# EAGLE board 256x64 (EAGLE 7.4.0)
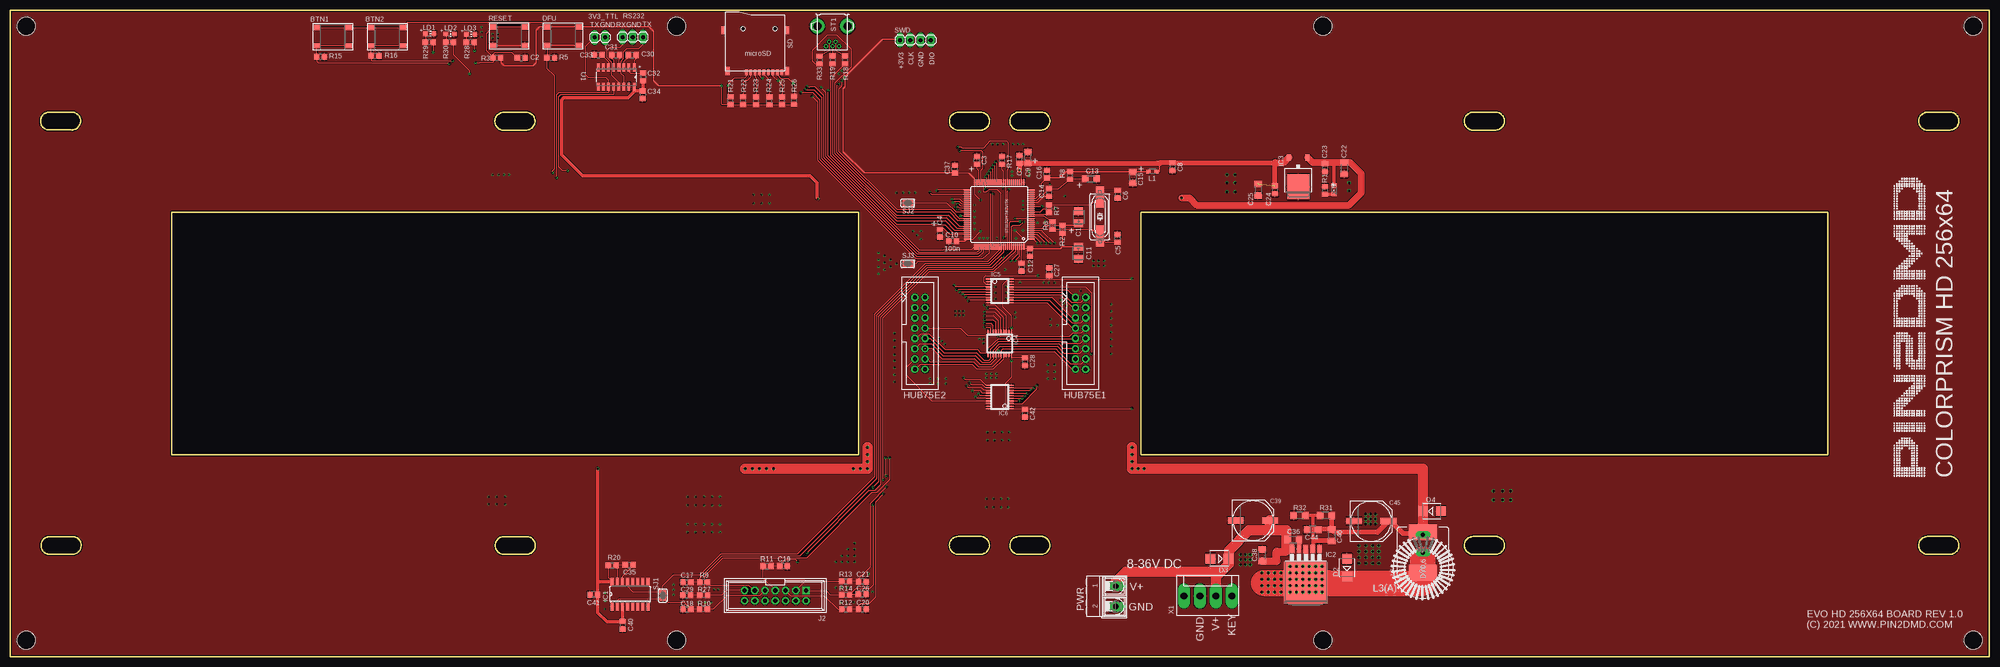
[diagram p0: board, top side]
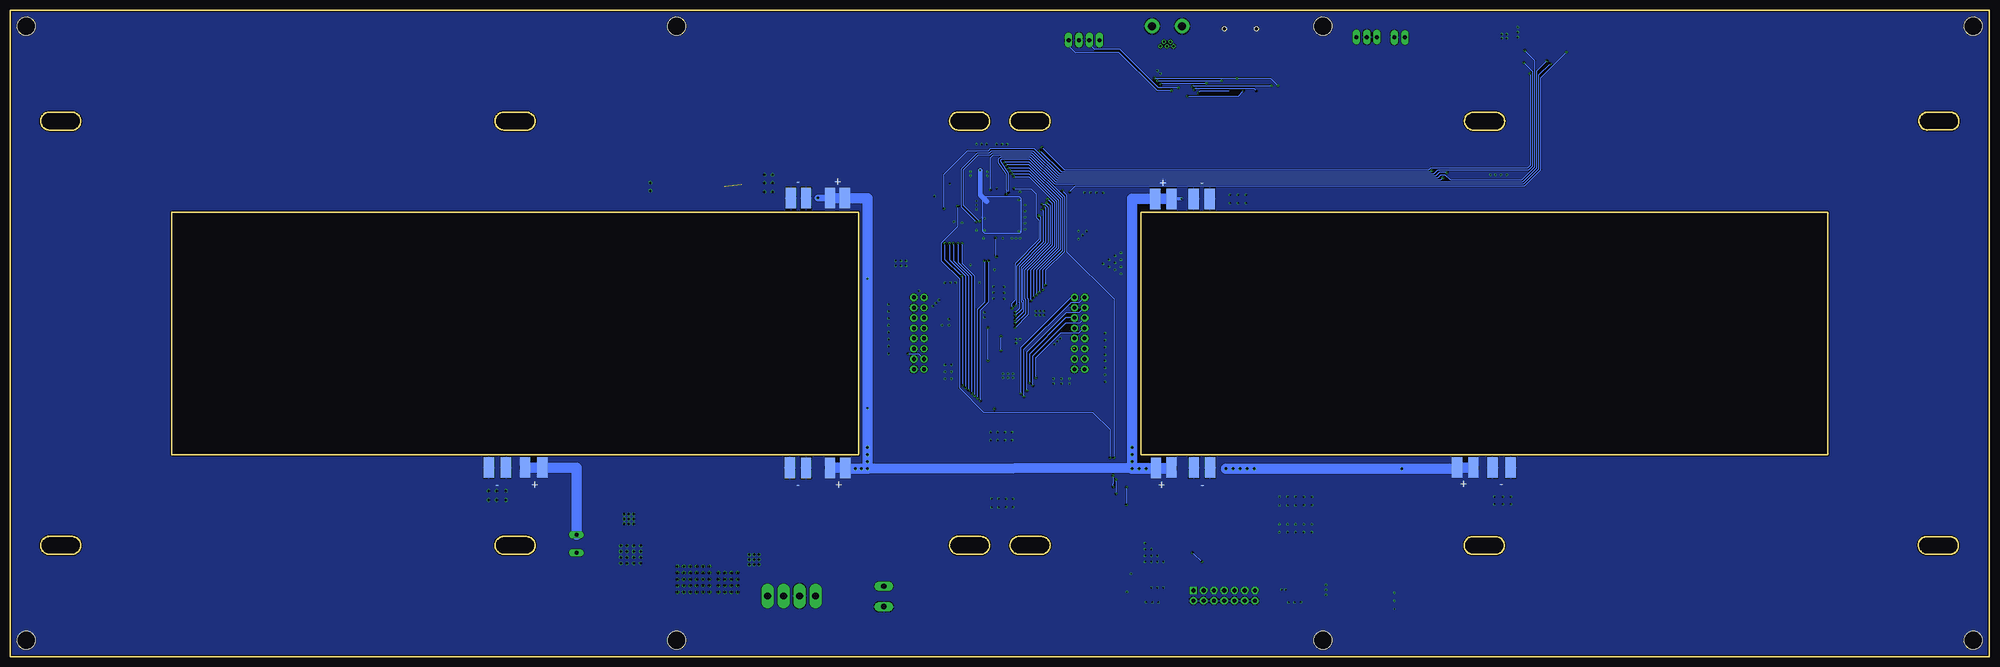
[diagram p1: board, bottom side, seen from below]

Size 490 x 160 mm. Coordinates in mm from the lower left corner, seen from the top.
Outline: 15.62,134.73 arc-174 15.11,130.32 9.44,130.32 arc-176 9.86,134.73 15.62,134.73
Outline: 15.62,134.73 15.71,134.73
Outline: 15.76,29.7 arc-174 15.25,25.3 9.57,25.3 arc-176 10,29.7 15.76,29.7
Outline: 15.76,29.7 15.84,29.7
Outline: 128.19,29.7 arc-174 127.68,25.3 122.01,25.3 arc-176 122.43,29.7 128.19,29.7
Outline: 128.19,29.7 128.37,29.7
Outline: 234.34,25.32 arc-174 234.85,29.72 240.52,29.72 arc-176 240.1,25.32 234.34,25.32
Outline: 234.34,25.32 234.26,25.32
Outline: 249.34,25.32 arc-174 249.85,29.72 255.52,29.72 arc-176 255.1,25.32 249.34,25.32
Outline: 249.34,25.32 249.26,25.32
Outline: 361.84,25.32 arc-174 362.35,29.72 368.02,29.72 arc-176 367.6,25.32 361.84,25.32
Outline: 361.84,25.32 361.76,25.32
Outline: 474.34,25.32 arc-174 474.85,29.72 480.52,29.72 arc-176 480.1,25.32 474.34,25.32
Outline: 474.34,25.32 474.26,25.32
Outline: 474.34,130.32 arc-174 474.85,134.72 480.52,134.72 arc-176 480.1,130.32 474.34,130.32
Outline: 474.34,130.32 474.26,130.32
Outline: 361.84,130.32 arc-174 362.35,134.72 368.02,134.72 arc-176 367.6,130.32 361.84,130.32
Outline: 361.84,130.32 361.76,130.32
Outline: 249.34,130.32 arc-174 249.85,134.72 255.52,134.72 arc-176 255.1,130.32 249.34,130.32
Outline: 249.34,130.32 249.26,130.32
Outline: 0,160 490,160 490,0 0,0 0,160
Outline: 40,50 210,50 210,110 40,110 40,50
Outline: 121.91,130.28 arc-176 122.33,134.69 128.09,134.69 arc-174 127.58,130.28 121.91,130.28
Outline: 234.43,130.3 arc-176 234.85,134.7 240.61,134.7 arc-174 240.1,130.3 234.43,130.3
Outline: 280,50 450,50 450,110 280,110 280,50
Copper layers (1*16): Top 0.035mm / dielectric 1.6mm / Bottom 0.035mm
Design rules "jlcpcb-2layers": minimum track width 5mil, minimum drill 0.3mm, track to track 5mil, track to pad 5mil, pad to pad 5mil, via to via 5mil, smd to smd 5mil, copper to edge 0.2mm, drill to drill 6mil, minimum pad ring 10mil, minimum via ring 3mil, stop-mask expansion 4mil, vias tented up to drill 0mil, thermal gap 10mil
Holes 4.5 mm at 4,156 165,156 486,156 486,4 165,4 4,4 325,156 325,4

## Footprints (pad centres in the part's own frame; a part is rotated, then mirrored left to right if it is on the bottom)
1X02 = drill 1.016 long: 1 -1.27,0; 2 1.27,0
430152043826 = smd 1.55 x 1.3: 1 -3.975,2.25; 2 -3.975,-2.25; 3 3.975,2.25; 4 3.975,-2.25
CT3528 = smd 2 x 2.2: + -1.5,0; - 1.5,0
C0805 = smd 1.3 x 1.5: 1 -0.95,0; 2 0.95,0
C1206 = smd 1.6 x 1.8: 1 -1.4,0; 2 1.4,0
PANASONIC_G = smd 3.9 x 1.6: + 4.25,0; - -4.25,0
SMB = smd 2.4 x 2.4: A 2.2,0; C -2.2,0
2X08-IDC = drill 1 pad 1.778: 1 -1.27,8.89; 2 1.27,8.89; 3 -1.27,6.35; 4 1.27,6.35; 5 -1.27,3.81; 6 1.27,3.81; 7 -1.27,1.27; 8 1.27,1.27; 9 -1.27,-1.27; 10 1.27,-1.27; 11 -1.27,-3.81; 12 1.27,-3.81; 13 -1.27,-6.35; 14 1.27,-6.35; 15 -1.27,-8.89; 16 1.27,-8.89
SO16 = smd 0.66 x 2.032: 1 -4.445,-3.073; 2 -3.175,-3.073; 3 -1.905,-3.073; 4 -0.635,-3.073; 5 0.635,-3.073; 6 1.905,-3.073; 7 3.175,-3.073; 8 4.445,-3.073; 9 4.445,3.073; 10 3.175,3.073; 11 1.905,3.073; 12 0.635,3.073; 13 -0.635,3.073; 14 -1.905,3.073; 15 -3.175,3.073; 16 -4.445,3.073
TO263-5 = smd 1.067 x 2.159: 1 -3.404,-5.791; 2 -1.702,-5.791; 3 0,-5.791; 4 1.702,-5.791; 5 3.404,-5.791 | smd 10.8 x 10.41: 6 0,2.54
TO252 = smd 1 x 1.6: 1 -2.28,-4.8; 2 2.28,-4.8 | smd 5.4 x 6.2: 3 0,2.5
TSSOP20 = smd 0.305 x 0.991: 1 -2.925,-2.918; 2 -2.275,-2.918; 3 -1.625,-2.918; 4 -0.975,-2.918; 5 -0.325,-2.918; 6 0.325,-2.918; 7 0.975,-2.918; 8 1.625,-2.918; 9 2.275,-2.918; 10 2.925,-2.918; 11 2.925,2.918; 12 2.275,2.918; 13 1.625,2.918; 14 0.975,2.918; 15 0.325,2.918; 16 -0.325,2.918; 17 -0.975,2.918; 18 -1.625,2.918; 19 -2.275,2.918; 20 -2.925,2.918
PINSHRD_PTH_2X07 = drill 1.016 square: 1 -7.62,-1.27 | drill 1.016 octagon: 2 -7.62,1.27; 3 -5.08,-1.27; 4 -5.08,1.27; 5 -2.54,-1.27; 6 -2.54,1.27; 7 0,-1.27; 8 0,1.27; 9 2.54,-1.27; 10 2.54,1.27; 11 5.08,-1.27; 12 5.08,1.27; 13 7.62,-1.27; 14 7.62,1.27
L2012C = smd 1 x 1: 1 -1,0; 2 1,0
ED16 = drill 1.016 long: 1 -8.255,0; 2 -3.81,0
SRR1206 = smd 4 x 7: 1 -5,0; 2 5,0
CHIP-LED0805 = smd 1.2 x 1.2: A 0,-1.05; C 0,1.05
SMD2,54-5,08 = smd 2.54 x 5.08: 1 0,0
CHIPLED_0805 = smd 1.2 x 1.2: A 0,-1.05; C 0,1.05
AK500/2-H = drill 1.321 long: 1 -2.515,0; 2 2.515,0
HC49UP = smd 5.334 x 1.93: 1 -4.826,0; 2 4.826,0
R0805 = smd 1.3 x 1.5: 1 -0.95,0; 2 0.95,0
R1206 = smd 1.6 x 1.803: 1 -1.422,0; 2 1.422,0
1X03 = drill 1.016 long: 1 -2.54,0; 2 0,0; 3 2.54,0
MR**-AP*03** = smd 0.6 x 1.5: CARD_DETECTION -6.55,0.3; CLK -2.15,0.3; CMD 0.05,0.3; DAT0 -4.35,0.3; DAT1 -5.45,0.3; DAT2 2.25,0.3; DAT3/CS 1.15,0.3; GND -3.25,0.3; VCC -1.05,0.3 | smd 1 x 2: SHD_1 -7.85,0; SHD_2 6.85,0; SHD_3 -7.85,-10.1; SHD_4 7.85,-10.1 | hole 1: -4.95,-10.5; 3.05,-10.5
SJ = smd 1.168 x 1.6: 1 -0.762,0; 2 0.762,0
USBMINI = drill 0.5: 1 -1.6,3; 2 -0.8,1.8; 3 0,3; 4 0.8,1.8; 5 1.6,3 | drill 2: N1 -3.7,-2; N2 3.7,-2
LQFP100 = smd 1.5 x 0.4: 1 -8,6.075; 25 -8,-6.075; 51 8,-6.075; 75 8,6.075 | smd 1.5 x 0.25: 2 -8,5.5; 3 -8,5; 4 -8,4.5; 5 -8,4; 6 -8,3.5; 7 -8,3; 8 -8,2.5; 9 -8,2; 10 -8,1.5; 11 -8,1; 12 -8,0.5; 13 -8,0; 14 -8,-0.5; 15 -8,-1; 16 -8,-1.5; 17 -8,-2; 18 -8,-2.5; 19 -8,-3; 20 -8,-3.5; 21 -8,-4; 22 -8,-4.5; 23 -8,-5; 24 -8,-5.5; 52 8,-5.5; 53 8,-5; 54 8,-4.5; 55 8,-4; 56 8,-3.5; 57 8,-3; 58 8,-2.5; 59 8,-2; 60 8,-1.5; 61 8,-1; 62 8,-0.5; 63 8,0; 64 8,0.5; 65 8,1; 66 8,1.5; 67 8,2; 68 8,2.5; 69 8,3; 70 8,3.5; 71 8,4; 72 8,4.5; 73 8,5; 74 8,5.5 | smd 0.4 x 1.5: 26 -6.075,-8; 50 6.075,-8; 76 6.075,8; 100 -6.075,8 | smd 0.25 x 1.5: 27 -5.5,-8; 28 -5,-8; 29 -4.5,-8; 30 -4,-8; 31 -3.5,-8; 32 -3,-8; 33 -2.5,-8; 34 -2,-8; 35 -1.5,-8; 36 -1,-8; 37 -0.5,-8; 38 0,-8; 39 0.5,-8; 40 1,-8; 41 1.5,-8; 42 2,-8; 43 2.5,-8; 44 3,-8; 45 3.5,-8; 46 4,-8; 47 4.5,-8; 48 5,-8; 49 5.5,-8; 77 5.5,8; 78 5,8; 79 4.5,8; 80 4,8; 81 3.5,8; 82 3,8; 83 2.5,8; 84 2,8; 85 1.5,8; 86 1,8; 87 0.5,8; 88 0,8; 89 -0.5,8; 90 -1,8; 91 -1.5,8; 92 -2,8; 93 -2.5,8; 94 -3,8; 95 -3.5,8; 96 -4,8; 97 -4.5,8; 98 -5,8; 99 -5.5,8
1X04 = drill 1.016 long: 1 -3.81,0; 2 -1.27,0; 3 1.27,0; 4 3.81,0
SOIC127P600X175-16N = smd 2.057 x 0.61: 1 -4.801,8.89; 2 -4.801,7.62; 3 -4.801,6.35; 4 -4.801,5.08; 5 -4.801,3.81; 6 -4.801,2.54; 7 -4.801,1.27; 8 -4.801,0; 9 0,0; 10 0,1.27; 11 0,2.54; 12 0,3.81; 13 0,5.08; 14 0,6.35; 15 0,7.62; 16 0,8.89
KK-156-4 = drill 1.7 pad 2.184 long: 1 -5.94,0; 2 -1.98,0; 3 1.98,0; 4 5.94,0

## Placement (x,y rotation side)
3V3_TTL  [1X02]  146,153.25 0 top
BTN1  430152043826  [430152043826]  79.89,153.42 180 top
BTN2  430152043826  [430152043826]  93.38,153.42 180 top
C1  1u  [CT3528]  264.49,108.74 90 top
C2  100n  [C0805]  126.54,148.18 0 top
C3  2u2  [C0805]  239.35,122.82 90 top
C4  2u2  [C0805]  230.22,104.82 270 top
C5  22p  [C0805]  274.19,103.5 90 top
C6  22p  [C0805]  274.21,114.47 270 top
C7  100n  [C0805]  249.84,123.06 90 top
C8  100n  [C0805]  287.76,121.25 270 top
C9  2u2  [C1206]  251.98,123.51 90 top
C10  100n  [C0805]  233.33,102.78 180 top
C11  2u2  [CT3528]  264.5,99.92 270 top
C12  100n  [C0805]  252.45,100.02 270 top
C13  1u  [C1206]  267.56,118.26 0 top
C14  100n  [C0805]  257.19,114.88 270 top
C15  1u  [C1206]  277.94,118.55 270 top
C16  100n  [C0805]  256.64,119.42 90 top
C17  47pF  [C0805]  167.55,18.41 0 top
C18  47pF  [C0805]  167.58,11.69 0 top
C19  47pF  [C0805]  191.47,22.42 180 top
C20  47pF  [C0805]  210.99,11.69 180 top
C21  47pF  [C0805]  210.99,18.54 180 top
C22  2u2  [C1206]  330.3,120.86 270 top
C23  100n  [C0805]  325.51,121.03 270 top
C24  100n  [C0805]  313.13,115.49 270 top
C25  2u2  [C1206]  308.95,115.56 270 top
C26  47pF  [C0805]  210.96,15.39 180 top
C27  100n  [C0805]  257.25,95.25 90 top
C28  100n  [C0805]  251.25,73 270 top
C29  47pF  [C0805]  167.51,15.16 0 top
C30  1u  [C0805]  154,148.89 0 top
C31  1u  [C0805]  149.91,148.89 0 top
C32  1u  [C0805]  156.69,143.47 270 top
C33  1u  [C0805]  145.62,148.91 0 top
C34  100n  [C0805]  156.61,139.05 270 top
C35  47p  [C0805]  153.26,22.67 0 top
C36  1uF  [C1206]  317.66,29 0 top
C37  100n  [C0805]  233.9,120.64 90 top
C38  1uF  [C1206]  310,25.06 90 top
C39  220uF/50V  [PANASONIC_G]  307.68,33.69 0 top
C40  100n  [C0805]  151.64,7.78 270 top
C41  100n  [C0805]  144.52,15.33 180 top
C42  100n  [C0805]  251.25,60.25 270 top
C44  1uF  [C1206]  322.48,31.41 180 top
C45  330uF/25V  [PANASONIC_G]  336.95,33.52 0 top
C46  1uF  [C1206]  327.18,30.05 270 top
D2  SK54  [SMB]  330.99,22.01 90 top
D3  SK54  [SMB]  299.36,24.23 180 top
D4  SK54  [SMB]  352,36 0 top
DFU  430152043826  [430152043826]  136.86,153.58 0 top
HUB75E1  RGB  [2X08-IDC]  265,80 0 top
HUB75E2  RGB  [2X08-IDC]  225.25,80 0 top
IC1  74LS123D  [SO16]  153.49,15.47 0 top
IC2  XL4015  [TO263-5]  320.76,20.84 180 top
IC3  TS 2940 CP33  [TO252]  318.92,118.73 180 top
IC4  74245PW  [TSSOP20]  245,77.5 180 top
IC5  74245PW  [TSSOP20]  245,90.5 270 top
IC6  74245PW  [TSSOP20]  245,64.25 90 top
J2  CON_HEADER_2X07-PTH-SHROUDED  [PINSHRD_PTH_2X07]  189.44,15.09 180 top
L1  FCM1608KF-601T03  [L2012C]  282.78,120 180 top
L3(A)  47uH/5A  [ED16]  349.8,21.91 270 top
L3A  [SRR1206]  349.75,25.75 90 top
LD1  red  [CHIP-LED0805]  103.87,154.17 270 top
LD2  yellow  [CHIP-LED0805]  108.94,154.1 270 top
LD3  blue  [CHIP-LED0805]  114,154.04 270 top
PAD1  [SMD2,54-5,08]  206.34,46.72 0 bottom
PAD2  [SMD2,54-5,08]  202.49,46.75 0 bottom
PAD3  [SMD2,54-5,08]  196.94,46.79 0 bottom
PAD4  [SMD2,54-5,08]  192.92,46.79 0 bottom
PAD5  [SMD2,54-5,08]  283.22,46.68 180 bottom
PAD6  [SMD2,54-5,08]  287.01,46.68 180 bottom
PAD7  [SMD2,54-5,08]  292.96,46.72 180 bottom
PAD8  [SMD2,54-5,08]  296.98,46.73 180 bottom
PAD9  [SMD2,54-5,08]  286.99,113.47 180 bottom
PAD10  [SMD2,54-5,08]  283.38,113.49 180 bottom
PAD11  [SMD2,54-5,08]  292.93,113.47 180 bottom
PAD12  [SMD2,54-5,08]  296.71,113.47 180 bottom
PAD13  [SMD2,54-5,08]  206.5,113.25 0 bottom
PAD14  [SMD2,54-5,08]  202.5,113.25 0 bottom
PAD15  [SMD2,54-5,08]  197,113.25 0 bottom
PAD16  [SMD2,54-5,08]  193,113.25 0 bottom
PAD17  [SMD2,54-5,08]  131.75,46.75 0 bottom
PAD18  [SMD2,54-5,08]  127.75,46.75 0 bottom
PAD19  [SMD2,54-5,08]  123,46.75 0 bottom
PAD20  [SMD2,54-5,08]  118.5,46.75 0 bottom
PAD21  [SMD2,54-5,08]  362.5,46.75 0 bottom
PAD22  [SMD2,54-5,08]  358.25,46.75 0 bottom
PAD23  [SMD2,54-5,08]  371.5,46.75 0 bottom
PAD24  [SMD2,54-5,08]  367.25,46.75 0 bottom
POWER  Power  [CHIPLED_0805]  327.75,115.52 180 top
PWR  [AK500/2-H]  273.68,14.88 270 top
Q1  8MHz  [HC49UP]  269.8,108.88 270 top
R1  470  [R0805]  325.53,115.35 270 top
R2  0R  [R0805]  260.56,105.74 270 top
R3  100k  [R0805]  120.51,148.18 0 top
R4  47R  [R0805]  250.39,96.38 270 top
R5  100k  [R0805]  133.84,148.18 0 top
R6  0R  [R0805]  258.02,106.69 90 top
R7  220R  [R0805]  257.19,110.84 270 top
R8  47R  [R0805]  262.4,119.09 90 top
R9  220  [R0805]  171.73,18.42 180 top
R10  220  [R0805]  171.67,11.67 180 top
R11  220  [R0805]  187.39,22.41 0 top
R12  220  [R0805]  206.89,11.69 0 top
R13  220  [R0805]  206.86,18.6 0 top
R14  220  [R0805]  206.85,15.33 0 top
R15  100k  [R0805]  76.87,148.5 0 top
R16  100k  [R0805]  90.36,148.66 0 top
R17  10k  [R0805]  245.6,122.8 270 top
R18  22  [R0805]  206.72,147.7 270 top
R19  22  [R0805]  203.61,147.7 270 top
R20  1k  [R0805]  149.08,22.63 0 top
R21  10k  [R0805]  178.32,137.58 90 top
R22  10k  [R0805]  181.51,137.58 90 top
R23  10k  [R0805]  184.7,137.54 90 top
R24  10k  [R0805]  187.96,137.52 90 top
R25  10k  [R0805]  191.14,137.57 90 top
R26  10k  [R0805]  194.13,137.64 90 top
R27  220  [R0805]  171.7,15.19 180 top
R28  680  [R0805]  113.93,152.03 180 top
R29  680  [R0805]  103.79,152.05 180 top
R30  680  [R0805]  108.82,152.03 180 top
R31  11k  [R1206]  325.74,34.93 0 top
R32  3k9  [R1206]  319.23,34.93 0 top
R33  0R  [R0805]  200.35,147.66 270 top
RESET  430152043826  [430152043826]  123.53,153.58 0 top
RS232  [1X03]  154.16,153.32 180 top
SD  [MR**-AP*03**]  184.47,144.92 180 top
SJ1  [SJ]  161.58,15.13 270 top
SJ2  [SJ]  222.25,112.25 0 top
SJ3  [SJ]  222.25,97.25 0 top
ST1  Mini-USB  [USBMINI]  203.57,154.01 180 top
STM32H743VIT6  STM32  [LQFP100]  244.87,109.42 180 top
SWD  [1X04]  224.12,152.57 0 top
U1  MAX232D  [SOIC127P600X175-16N]  145.6,141.01 270 top
X1  [KK-156-4]  296.5,15 0 top

## Library data of the parts
3V3_TTL RS232 SWD = pinhead
BTN1 BTN2 DFU RESET = Switches_rev16a
C1 C2 C5-C8 C10-C12 C16 C23 C24 C37 L1 R1 R2 R4 R6-R8 R17 R20 = rcl
C3 C4 C9 C13-C15 C17-C22 C25-C36 C38-C42 C44-C46 R3 R5 R9-R16 R18 R19 R21-R33 = resistor
D2-D4 = diode
HUB75E1 HUB75E2 LD1-LD3 = adafruit
IC1 IC4-IC6 = 74xx-eu
IC2 = linear4
IC3 = linear
J2 = dp_devices.v6
L3(A) = inductors
L3A = inductor-bourns
PAD1-PAD24 = wirepad
POWER = led
PWR = con-ptr500; OC_FARNELL: unknown; OC_NEWARK: unknown
Q1 = crystal; OC_FARNELL: unknown; OC_NEWARK: unknown
SD = 000_eigene_Bauteile
SJ1-SJ3 = jumper
ST1 = con-amp
STM32H743VIT6 = STM32F407Vx_LQFP100
U1 = MAX232D
X1 = con-molex; OC_FARNELL: unknown; OC_NEWARK: unknown

## Nets
+3V3: BTN1.2 BTN1.4 BTN2.2 BTN2.4 C7.1 C8.1 C9.1 C10.1 C11.+ C12.1 C24.1 C25.1 C37.1 DFU.1 DFU.3 IC3.2 L1.1 R2.2 R3.2 R21.1 R22.1 R23.1 R24.1 R25.1 R26.1 SD.VCC STM32H743VIT6.11 STM32H743VIT6.27 STM32H743VIT6.50 STM32H743VIT6.75 STM32H743VIT6.100 SWD.1
+5V: C22.1 C23.1 C27.1 C28.1 C32.2 C34.1 C40.1 C41.1 C42.1 C44.1 C45.+ C46.1 D4.C IC1.3 IC1.16 IC3.1 IC4.1 IC4.20 IC5.1 IC5.20 IC6.1 IC6.20 L3(A).1 L3A.2 PAD1.1 PAD2.1 PAD5.1 PAD6.1 PAD9.1 PAD10.1 PAD13.1 PAD14.1 PAD17.1 PAD18.1 PAD21.1 PAD22.1 POWER.A R20.1 R31.2 U1.16
B0_1: HUB75E2.3 IC6.14
B0_2: HUB75E1.3 IC5.14
B1_1: HUB75E2.7 IC6.11
B1_2: HUB75E1.7 IC5.11
BOOT0: DFU.2 DFU.4 R5.1 STM32H743VIT6.94
CLK1: HUB75E2.13 IC6.17
CLK2: HUB75E1.13 IC5.17
G0_1: HUB75E2.2 IC6.15
G0_2: HUB75E1.2 IC5.15
G1_1: HUB75E2.6 IC6.12
G1_2: HUB75E1.6 IC5.12
GND: 3V3_TTL.2 C1.- C2.2 C3.2 C4.2 C5.2 C6.2 C7.2 C8.2 C9.2 C10.2 C11.- C12.2 C13.2 C14.2 C15.2 C16.2 C17.1 C18.1 C19.1 C20.1 C21.1 C22.2 C23.2 C24.2 C25.2 C26.1 C27.2 C28.2 C29.1 C33.1 C34.2 C37.2 C38.2 C39.- C40.2 C41.2 C42.2 C44.2 C45.- D2.A D3.A D4.A HUB75E1.4 HUB75E1.16 HUB75E2.4 HUB75E2.16 IC1.1 IC1.8 IC2.1 IC3.3 IC4.2 IC4.10 IC4.19 IC5.2 IC5.10 IC5.19 IC6.2 IC6.10 IC6.19 J2.2 J2.4 J2.6 J2.8 J2.10 J2.12 J2.14 LD1.C LD2.C LD3.C PAD3.1 PAD4.1 PAD7.1 PAD8.1 PAD11.1 PAD12.1 PAD15.1 PAD16.1 PAD19.1 PAD20.1 PAD23.1 PAD24.1 PWR.2 R1.1 R4.2 R5.2 R15.2 R16.2 R17.1 R32.1 RESET.2 RESET.4 RS232.2 SD.GND SJ2.1 SJ3.1 ST1.5 ST1.N1 ST1.N2 STM32H743VIT6.10 STM32H743VIT6.19 STM32H743VIT6.26 STM32H743VIT6.49 STM32H743VIT6.54 STM32H743VIT6.74 SWD.3 U1.15 X1.2
N$1: C5.1 Q1.2 R6.1
N$2: C6.1 Q1.1 R7.1
N$3: POWER.C R1.2
N$4: J2.13 R27.1
N$5: J2.11 R9.1
N$6: J2.9 R10.1
N$7: J2.7 R11.1
N$8: J2.5 R12.1
N$9: J2.3 R13.1
N$10: C35.1 IC1.15 R20.2
N$11: J2.1 R14.1
N$13: C30.2 U1.1
N$14: C30.1 U1.3
N$15: C31.2 U1.4
N$16: C31.1 U1.5
N$17: C33.2 U1.6
N$18: C32.1 U1.2
N$19: LD1.A R29.2
N$20: D2.C IC2.3 IC2.6 L3(A).2 L3A.1
N$21: C46.2 IC2.2 R31.1 R32.2
N$22: C35.2 IC1.14
N$23: LD3.A R28.2
N$24: C36.2 IC2.4
N$25: R33.1 ST1.4
N$26: LD2.A R30.2
N$39: R19.1 ST1.3
N$40: R18.1 ST1.2
N$45: IC6.18
N$62: IC5.18
PA0: STM32H743VIT6.22
PA1: STM32H743VIT6.23
PA2: STM32H743VIT6.24
PA3: STM32H743VIT6.25
PA4: STM32H743VIT6.28
PA5: STM32H743VIT6.29
PA6: STM32H743VIT6.30
PA7: STM32H743VIT6.31
PA8: STM32H743VIT6.67
PA9: STM32H743VIT6.68
PA10: R33.2 STM32H743VIT6.69
PA11: R18.2 STM32H743VIT6.70
PA12: R19.2 STM32H743VIT6.71
PA13: STM32H743VIT6.72 SWD.4
PA14: STM32H743VIT6.76 SWD.2
PA15: STM32H743VIT6.77
PB0: R30.1 STM32H743VIT6.34
PB1: C26.2 R14.2 STM32H743VIT6.35
PB2: R17.2 STM32H743VIT6.36
PB4: C17.2 R9.2 STM32H743VIT6.90
PB5: STM32H743VIT6.91
PB6: 3V3_TTL.1 STM32H743VIT6.92 U1.11
PB7: R28.1 STM32H743VIT6.93
PB8: C19.2 R11.2 STM32H743VIT6.95
PB9: C20.2 R12.2 STM32H743VIT6.96
PB11: STM32H743VIT6.47 U1.12
PB12: C21.2 R13.2 STM32H743VIT6.51
PB13: STM32H743VIT6.52
PB14: R29.1 STM32H743VIT6.53
PC0: STM32H743VIT6.15
PC1: STM32H743VIT6.16
PC2: C29.2 R27.2 STM32H743VIT6.17
PC3: STM32H743VIT6.18
PC4: STM32H743VIT6.32
PC5: STM32H743VIT6.33
PC6: STM32H743VIT6.63
PC7: IC4.3 STM32H743VIT6.64
PC7_: HUB75E1.15 HUB75E2.15 IC4.17
PC8: R25.2 SD.DAT0 STM32H743VIT6.65
PC9: R26.2 SD.DAT1 STM32H743VIT6.66
PC10: R21.2 SD.DAT2 STM32H743VIT6.78
PC11: R22.2 SD.DAT3/CS STM32H743VIT6.79
PC12: R24.2 SD.CLK STM32H743VIT6.80
PC13: STM32H743VIT6.7
PC14: STM32H743VIT6.8
PC15: STM32H743VIT6.9
PD0: STM32H743VIT6.81
PD1: STM32H743VIT6.82
PD2: R23.2 SD.CMD STM32H743VIT6.83
PD3: BTN1.1 BTN1.3 R15.1 STM32H743VIT6.84
PD4: BTN2.1 BTN2.3 R16.1 STM32H743VIT6.85
PD5: STM32H743VIT6.86
PD6: STM32H743VIT6.87
PD7: SJ3.2 STM32H743VIT6.88
PD8: STM32H743VIT6.55
PD9: STM32H743VIT6.56
PD10: IC4.9 STM32H743VIT6.57
PD10_: HUB75E1.9 HUB75E2.9 IC4.11
PD11: IC4.8 STM32H743VIT6.58
PD11_: HUB75E1.10 HUB75E2.10 IC4.12
PD12: IC4.7 STM32H743VIT6.59
PD12_: HUB75E1.11 HUB75E2.11 IC4.13
PD13: IC4.6 STM32H743VIT6.60
PD13_: HUB75E1.12 HUB75E2.12 IC4.14
PD14: IC4.5 STM32H743VIT6.61
PD14_: HUB75E1.8 HUB75E2.8 IC4.15
PD15: SJ2.2 STM32H743VIT6.62
PD15_: HUB75E1.14 HUB75E2.14 IC4.16
PDRON: R4.1 STM32H743VIT6.99
PE0: IC6.4 STM32H743VIT6.97
PE1: IC6.5 STM32H743VIT6.98
PE2: IC6.6 STM32H743VIT6.1
PE3: IC6.7 STM32H743VIT6.2
PE4: IC6.8 STM32H743VIT6.3
PE5: IC6.9 STM32H743VIT6.4
PE6: IC5.3 IC6.3 STM32H743VIT6.5
PE7: STM32H743VIT6.37
PE8: STM32H743VIT6.38
PE9: IC5.4 STM32H743VIT6.39
PE10: IC5.5 STM32H743VIT6.40
PE11: IC5.6 STM32H743VIT6.41
PE12: IC5.7 STM32H743VIT6.42
PE13: IC5.8 STM32H743VIT6.43
PE14: IC5.9 STM32H743VIT6.44
PE15: IC4.4 STM32H743VIT6.45
PH0: R6.2 STM32H743VIT6.12
PH1: R7.2 STM32H743VIT6.13
PIN_DMD_DCLK: C18.2 IC1.2 R10.2 SJ1.2
PIN_DMD_DCLK_: IC1.13 SJ1.1 STM32H743VIT6.46 STM32H743VIT6.89
R0_1: HUB75E2.1 IC6.16
R0_2: HUB75E1.1 IC5.16
R1_1: HUB75E2.5 IC6.13
R1_2: HUB75E1.5 IC5.13
RESET: C2.1 R3.1 RESET.1 RESET.3 STM32H743VIT6.14
RX1: RS232.3 U1.13
TX1: RS232.1 U1.14
VBAT: C1.+ R2.1 STM32H743VIT6.6
VCAP1: C3.1 STM32H743VIT6.48
VCAP2: C4.1 STM32H743VIT6.73
VDDA: C15.1 C16.1 L1.2 R8.2 STM32H743VIT6.21
VIN: C36.1 C38.1 C39.+ D3.C IC2.5 PWR.1 X1.3
VREF: C13.1 C14.1 R8.1 STM32H743VIT6.20

## Tracks (layer width: path | path; a pad name or v marks a point on that pad's centre or on a via)
+3V3  (via drill 0.3, 0.34 pad 0.25)  (1 unrouted)
  Top 0.254: 260.58,101.52 260.69,101.41 | 238.8,118.3 238.79,118.3 STM32H743VIT6.50 238.79,114.45 v240.25,113 | STM32H743VIT6.75 238.34,103.34 v240.25,105.25 | v248.75,105.5 250.94,103.31 STM32H743VIT6.100 251.4,100.97 C12.1 | STM32H743VIT6.11 v248.78,108.42 v248.77,108.41 | STM32H743VIT6.27 250.37,119.83 v249.85,120.35
  Top 0.305: 249.88,121.87 C7.1 | v176.13,141.25 176.13,136.81 176.31,136.63 R21.1 R22.1 | 185.66,145.06 185.66,144.76 SD.VCC 185.52,143.73 186.08,143.17 v186.28,143.17 v186.29,143.16 | R22.1 | R22.1 184.63,136.63 R23.1 187.94,136.59 R24.1 191.09,136.57 R25.1 194.06,136.62 R26.1 | BTN1.4 BTN1.2 BTN2.4 BTN2.2 98.48,157.05 131.67,157.05 DFU.1
  Top 0.406: C10.1 236.32,102.78 236.32,102.79 STM32H743VIT6.75 | R2.2 260.58,101.52 260.03,100.97 C12.1 | 260.69,101.41 C11.+ | 252.21,122.14 C9.1 | 234.01,119.61 C37.1 | 234.14,119.75 C37.1 | 253.42,122.17 253.45,122.14 | 284.45,122.14 284.55,122.04 284.55,120.05 284.48,119.98 283.78,119.98 L1.1 | 238.8,118.3 237.42,119.67 C37.1 | C37.1 211.56,119.69 206.25,125 206.25,140.5 206.75,141 v206.75,143.25 206.75,143.5 216,152.75 220.13,152.75 SWD.1 | 176.25,141.25 v176.13,141.25 160.5,141.25 159.25,142.5 159.25,154.75 158.17,155.83 DFU.3 DFU.1 131.08,155.83 130.25,155 130.25,147 129.5,146.25 122.25,146.25 121.5,147 121.5,148.15 R3.2
  Top 1.27: 249.88,121.87 249.88,120.38 v249.85,120.35 | 252.21,122.14 253.45,122.14 284,122.14 | 284,122.14 284.91,122.14 | C9.1 C7.1 | 284.86,122.25 287.25,122.25 287.3,122.2 C8.1 313.13,122.2 313.13,121.75 | 284.86,122.25 284,122.14 | 284.86,122.25 284.76,122.25 284.55,122.04 | C24.1 313.13,121.75 | 313.13,121.75 313.13,122.24
  Top 1.676: 313.13,122.24 315.35,122.24 IC3.2
  Bottom 0.254: 239.65,105.5 239.65,105.15 240.05,104.75 248.75,104.75 249.35,105.35 249.35,105.5 | 239.65,105.5 239.65,113 | 239.65,113 239.65,113.25 240.15,113.75 248.25,113.75 | 248.25,113.75 248.75,113.75 249.35,113.15 249.35,108.75 | 249.35,108.75 249.35,105.5 | v240.25,113 239.65,113 | v240.25,105.25 239.9,105.25 239.65,105.5 | v248.75,105.5 249.35,105.5 | 249.85,114.25 249.75,114.25 248.25,112.75 248.25,113.75 | v248.77,108.41 249.01,108.41 249.35,108.75 | v206.75,143.25 206.75,143.16
  Bottom 0.305: 206.81,143.16 206.75,143.16 v186.29,143.16 178.04,143.16 v176.13,141.25
  Bottom 1.27: v249.85,120.35 249.85,114.25 248.25,112.65
  pour Bottom: 239.65,113.25 240.15,113.75 248.75,113.75 249.35,113.15 249.35,105.35 248.75,104.75 240.05,104.75 239.65,105.15
+5V  (via drill 0.34 pad 0.25, 0.35, 0.5, 0.6)
  Top 0.152: 145.5,15.38 C41.1 | R20.1 | C23.1 325.5,122 325.5,122.25
  Top 0.254: IC1.16 148.13,19.47 R20.1 | IC5.1 247,93.42 | 247,93.42 IC5.20 257.25,93.42 | 257.25,93.42 277.68,93.42 v277.75,93.5 | 247,93.42 245.75,92.17 245.75,86.5 247.93,84.33 247.9,81.35 v247.9,81.4 247.93,81.38 IC4.1 | IC6.20 v246.25,61.33 | 251.25,61.33 IC6.1 v246.25,61.33 | 251.25,61.33 277.57,61.33 v277.75,61.5 | 247.91,71 v247.9,73.25 247.93,73.28 IC4.20 247.93,74 247.9,74 247.9,73.95 C28.1 | 247.91,71 247.93,69.17 246.25,67.5 v246.25,61.33 | C27.1 257.25,93.42 | 247.91,71 | C42.1 251.25,61.33
  Top 0.305: 149.05,18.5 IC1.16
  Top 0.813: IC1.3 151.64,12.4 C40.1 151.49,8.57 147.79,8.57 145.5,10.87 145.5,15.38 145.5,18.5 | 149.05,18.5 145.5,18.5 | C34.1 154.49,140 U1.16 | C34.1 156.69,140 C32.2 | 145.5,18.5 v145.5,46.5 | POWER.A 327.75,122.25 | C34.1 154.75,140 153,138.25 137,138.25 136.5,137.75 136.5,124.25 141.75,119 198,119 199.75,117.25 199.75,113.5 v200,113.25
  Top 1.27: L3A.2 349.8,30.75 | 349.8,30.75 L3(A).1 349.46,30.5 344.75,30.5 341.8,33.45 341.2,33.45 | C46.1 323.88,31.45 C44.1 | C46.1 327.18,34.91 R31.2 | C45.+ 341.2,33.45 | 341.2,33.45 338.5,30.75 327.88,30.75 C46.1 | 349.8,30.75 349.8,35.5 D4.C
  Top 1.676: IC3.1 322.48,122.25 325.25,122.25 325.5,122.25 327.75,122.25 C22.1 331.75,122.25 334.5,119.5 334.5,114.75 331.5,111.75 293.75,111.75 292,113.5 v290,113.5
  Top 2.54: L3A.2 349.75,46.5 v277.75,46.5 v277.75,51.75 | v189,46.5 v208.75,46.5 v210.5,46.5 v212.25,46.5 v212.25,51.75 | 188.75,46.5 v187.25,46.5 v182,46.5
  Bottom 0.254: v247.9,73.25 v247.9,81.4
  Bottom 0.813: v200,113.25 203,113.25
  Bottom 1.27: PAD2.1 PAD1.1
  Bottom 1.676: PAD9.1 289.97,113.47 v290,113.5
  Bottom 2.54: PAD5.1 283.2,47.31 | PAD6.1 283.75,46.68 | 283.75,46.68 PAD5.1 | PAD9.1 284.2,113.47 PAD10.1 277.75,113.49 v277.75,93.5 v277.75,61.5 v277.75,51.75 v277.75,50 v277.75,48.25 v277.75,46.5 v279.25,46.5 v280.75,46.5 | 283.75,46.75 283.75,46.68 | PAD14.1 203,113.25 PAD13.1 212.25,113.25 v212.25,51.75 v212.25,50 v212.25,48.25 v212.25,46.5 v210.5,46.5 v208.75,46.5 202.49,46.5 PAD2.1 280.5,46.5 v280.75,46.5 | PAD21.1 PAD22.1 349.8,46.75 L3(A).1 | PAD18.1 PAD17.1 131.75,46.5 v145.5,46.5 v182,46.5 v183.75,46.5 v185.5,46.5 v187.25,46.5 v189,46.5 | v280.75,46.5 283.04,46.5 PAD5.1
B0_1  (via drill 0.35)
  Top 0.254: IC6.14 240.78,65.22 240.25,65.75 v238.25,65.75
  Bottom 0.254: HUB75E2.3 224.15,86.35 225.4,85.1 228.6,85.1 238.25,75.5 v238.25,65.75
B0_2
  Top 0.254: IC5.14 259.98,89.53 263.25,86.25 263.63,86.25 HUB75E1.3
B1_1  (via drill 0.35)
  Top 0.254: IC6.11 241.57,67.17 240.25,68.5 236.5,68.5 v236,69
  Bottom 0.254: HUB75E2.7 arc-45 224.41,81.09 225.5,80 230,80 236,74 v236,69
B1_2
  Top 0.254: IC5.11 256.68,87.58 263,81.25 263.71,81.25 HUB75E1.7
BOOT0  (via drill 0.3, 0.34 pad 0.25)
  Top 0.254: v250.87,107.55 250.07,106.75 248.25,106.75 247.89,106.39 247.89,101.44 STM32H743VIT6.94 | v134.25,119.75 134.25,120.25 134.75,120.75
  Top 0.305: DFU.2 DFU.4 DFU.2 R5.1 133,148.08 133,145.5 134.75,143.75 134.75,120.75
  Bottom 0.254: v250.87,107.55 250.9,107.58 250.9,107.65 254.5,111.25 254.5,120.75 250.5,124.75 247.5,124.75 247,125.25 236.75,125.25 230.5,119 137,119 136,120 134.5,120 v134.25,119.75
CLK1
  Top 0.254: IC6.17 241.81,63.25 228.25,63.25 222,69.5 222,71.67 HUB75E2.13
CLK2  (via drill 0.34)
  Top 0.254: IC5.17 266.27,91.47 267.75,90 v267.75,75
  Bottom 0.254: v267.75,75 265.08,75 HUB75E1.13
G0_1  (via drill 0.35)
  Top 0.254: IC6.15 240.18,64.58 v239.75,65
  Bottom 0.254: v239.75,65 239.75,76.5 227.36,88.89 HUB75E2.2
G0_2
  Top 0.254: HUB75E1.2 266.27,88.87 265,87.6 262.9,87.6 260.32,90.17 IC5.15
G1_1  (via drill 0.35)
  Top 0.254: v237.5,67.75 238,67.25 240.75,67.25 241.47,66.53 IC6.12
  Bottom 0.254: HUB75E2.6 228.69,83.81 237.5,75 v237.5,67.75
G1_2
  Top 0.254: HUB75E1.6 266.27,83.77 265,82.5 263,82.5 262.62,82.88 262.5,83 257.27,88.22 IC5.12
GND  (via drill 0.3, 0.34 pad 0.25, 0.6)
  Top 0.254: C14.2 257.15,113.89 255.93,113.89 254.46,112.42 STM32H743VIT6.19 | STM32H743VIT6.74
  Top 0.305: RESET.2 RESET.4
  other vias: 257.38,117.06 261.19,113.89 254.35,107.38 256.36,107.61 147.28,15.81 147.28,13.8 147.28,11.78 335.6,35.25 336.8,35.25 338,35.25 335.6,34.05 336.8,34.05 338,34.05 335.6,32.85 336.8,32.85 338,32.85 333.9,27.45 335.6,27.45 337.3,27.45 333.9,26 335.6,26 337.3,26 333.9,24.55 335.6,24.55 337.3,24.55 333.9,23.1 335.6,23.1 337.3,23.1 248,120 248,119 252.25,120 252.25,119 250.75,110.75 250.75,105.5 238.75,111.75 238.75,105.75 240,115 244.25,103.5 249,103.5 338.8,27.45 338.8,26 338.8,24.55 338.8,23.1 301.25,119.25 303.25,119.25 301.25,117.25 303.25,117.25 301.25,115 303.25,115 331.5,117.25 331.5,115.25 116.75,155.75 116.75,154.5 116.75,153.25 119.5,154 119.5,153 120.75,153 120.75,154 243.25,126.75 244.5,126.75 245.75,126.75 248.25,126.75 249.5,126.75 250.75,126.75 245.75,115.75 244,88.5 244,90 244,91.5 250,92.5 246.25,95.75 252.25,97 246.5,91.5 246.5,90 246.5,88.5 256,92.5 257.25,92.5 258.5,92.5 257.5,83.5 257.5,82 259.25,82 260,88.25 260.75,87.5 261.5,86.75 257,72.25 258.5,72.25 243,69 241.75,69 258.5,70.5 257,68.75 257,70.5 227.75,68.75 229.75,68.75 229.75,67.5 227.75,67.5 212.5,20.5 213.5,16 205.75,13.5 207.25,13.5 208.75,13.5 207.5,17 206,17 204.5,17 173.5,13.5 172,13.5 170.5,13.5 164.25,15.25 164.25,16.5 164.25,17.75 174.25,16.5 175.25,16.5 204.5,23.5 206,23.5 207.5,23.5 209,23.5 209,25 209,26.5 209,28 207.5,26.5 207.5,25 206,25 215,100 215,98.25 215,96.5 215,94.75 216.5,95.75 216.5,97.5 216.5,99.25 218,98.25 218,96.5 219.5,97.25 250.75,111.75 250.75,112.75 240,103.5 241,103.5 242,103.5 238.75,107.25 238.75,108.75 238.75,110.25 242,55.5 243.75,55.5 245.5,55.5 247.25,55.5 242,53.5 243.75,53.5 245.5,53.5 247.25,53.5 241.75,39 243.5,39 245.25,39 247,39 241.75,37 243.5,37 245.25,37 247,37 219,80 219,78.25 219,76.5 219,74.75 219,73.25 219,71.5 219,69.75 219,68 272.5,87.25 272.5,85.5 272.5,83.75 272.5,82 272.5,80.25 272.5,78.5 272.5,76.75 272.5,75 304.6,25.25 305.8,25.25 307,25.25 304.6,24 305.8,24 307,24 304.6,22.75 305.8,22.75 307,22.75 119.5,119.25 121,119.25 122.25,119.25 123.5,119.25 223.5,105.25 224.5,104.25 225.5,103.25 225.5,105.25 268.25,98 269.5,98 270.75,98 270.75,96.75 269.5,96.75 268.25,96.75 367.25,41 369.5,41 371.5,41 371.5,38.75 369.5,38.75 367.25,38.75 167.75,39.5 118.5,39.5 120.5,39.5 122.5,39.5 122.5,37.75 120.5,37.75 118.5,37.75 169.75,39.5 171.75,39.5 173.75,39.5 175.75,39.5 167.75,37.5 169.75,37.5 171.75,37.5 173.75,37.5 175.75,37.5 167.75,32.75 169.75,32.75 171.75,32.75 173.75,32.75 175.75,32.75 167.75,30.75 169.75,30.75 171.75,30.75 173.75,30.75 175.75,30.75 265,90.5 219.5,114.75 221,114.75 222.5,114.75 224,114.75 241.75,70 243,70 244.25,70 244.25,69 231.75,68.75 231.75,67.5 230,78.75 230.75,78 231.5,77.25 234,85.5 235,85.5 236,85.5 236,84.5 235,84.5 234,84.5 240,78.5 241,78.5 241,77.5 248.75,85.25 248.75,84 258.5,68.75 184,114.25 186,114.25 188,114.25 188,112.25 186,112.25 184,112.25 205.25,144.25 206,145
  pour Bottom: 0,160 490,160 490,0 0,0
  pour Top: 0,160 0,0 490,0 490,160
N$1
  Top 0.254: R6.1 267.8,105.73 Q1.2 271.18,102.55 C5.1
N$2
  Top 0.254: R7.1 267.42,111.79 Q1.1 270.19,115.56 C6.1
N$3
  Top 0.813: R1.2 327.69,114.4 POWER.C
N$4
  Top 0.254: J2.13 177.38,16.36 176.19,15.18 172.66,15.18 R27.1
N$5
  Top 0.254: J2.11 184.25,16.36 182.93,17.55 173.42,17.55 R9.1
N$6
  Top 0.254: J2.9 186.82,16.36 185.5,15.04 177.45,15.04 174.08,11.68 R10.1
N$7
  Top 0.254: J2.7 186.44,19.36 R11.1
N$8
  Top 0.254: J2.5 193.23,15.11 201.49,15.11 204.91,11.69 R12.1
N$9
  Top 0.254: J2.3 196.76,18.6 R13.1
N$10
  Top 0.152: 152.25,22.62 C35.1 | 150.38,18.62 IC1.15 | 150.38,22.62 150.12,22.62 R20.2 150.38,22.62
  Top 0.254: IC1.15 150.32,22.57 150.38,22.62 150.42,22.67 C35.1
N$11
  Top 0.254: J2.1 197.12,16.3 202.08,16.3 203.05,15.33 R14.1
N$13
  Top 0.254: C30.2 154.96,147.91 154.51,147.47 154.51,145.84 U1.1
N$14
  Top 0.254: C30.1 153.06,148.34 151.93,147.22 151.93,145.82 U1.3
N$15
  Top 0.254: C31.2 150.86,147.85 150.68,147.67 U1.4
N$16
  Top 0.254: C31.1 148.96,148.13 149.43,147.67 149.43,145.83 U1.5
N$17
  Top 0.254: C33.2 146.57,148.81 148.17,147.2 148.17,145.85 U1.6
N$18
  Top 0.152: 156.62,144.5 C32.1
  Top 0.254: U1.2 153.22,144.8 153.65,144.36 156.63,144.36 C32.1
N$19
  Top 0.254: LD1.A 102.82,152.07 R29.2
N$20  (via drill 0.6 pad 0.25)
  Top 0.406: L3A.1 345.24,19.25 349.75,20.63
  Top 0.813: v321.62,20.73 320.85,21.5 320.75,21.5 320.75,21.44 v320.04,20.73 | v321.62,19.14 321.62,18.66 321.3,18.34 321.62,18.03 v321.62,17.55 | IC2.6 320.87,18.3 v321.62,17.55 | 320.75,19.88 320.75,19.85 v320.04,19.14 | 320.65,18.19 320.65,18.16 v320.04,17.55 | v320.04,15.96 v320.04,17.55 | v320.04,19.14 v318.45,20.73 | v318.45,20.73 v316.86,22.31 v316.86,20.73 v316.86,19.14 v316.86,17.55 v316.86,15.96 v318.45,15.96 v318.45,17.55 v318.45,19.14 v318.45,20.73 | v318.45,22.31 v318.45,20.73 | v321.62,22.31 v320.04,22.31 v320.04,20.73 | v320.04,20.73 v320.04,19.14 | v320.04,19.14 v320.04,17.55 | v320.04,17.55 320.04,15.81 321.46,15.81 v321.62,15.96 v321.62,17.55 | v321.62,17.55 v321.62,20.73 | v321.62,20.73 v321.62,22.31 | v321.62,22.31 v323.21,22.31 v323.21,20.73 v323.21,19.14 v324.8,19.14 | v323.21,17.55 v323.21,15.96 v324.8,15.96 v324.8,17.55 v324.8,19.14 | v324.8,19.14 v324.8,20.73 v324.8,22.31 | v313.05,19.14 v311.46,19.14 v311.46,20.73 | v311.46,20.73 v313.05,20.73 v314.64,20.73 v314.64,19.14 | v314.64,15.96 v314.64,17.55 v313.05,17.55 | v313.05,17.55 v313.05,15.96 | v313.05,17.55 v311.46,17.55 v311.46,15.96 | v309.88,17.55 v309.88,15.96 | v309.88,20.73 v311.46,20.73
  Top 1.27: 320.75,23 320.75,21.5 | IC2.3 320.75,23.11 | 320.75,23.11 320.75,23 | 320.75,19.88 IC2.6 | L3(A).2 349.75,24.02 | D2.C 326.3,18.2 | v321.62,22.31 321.54,22.31 320.75,23.11 | 319.88,22.31 v320.04,22.31 320.72,23 320.75,23 | v311.46,17.55 v309.88,19.14 310.04,19.14 | v309.88,17.55 310.37,18.04 310.37,18.2 310.04,18.53 310.04,19.14 | 310.04,19.14 v311.46,19.14 | 310.04,19.14 311.62,17.55
  Top 1.93: 320.75,19.88 320.75,23
  Top 6.452: 320.75,19.88 321.22,18.2 | 349.75,24.02 349.75,20.63 349.76,18.2 326.3,18.2 310.37,18.2 310.35,18.19 320.65,18.19 IC2.6
N$21
  Top 0.813: 322.49,26.45 322.49,34.98 | 322.49,34.98 324.32,34.98 R31.1 | 322.49,34.98 320.65,34.98 R32.2 | 322.49,26.45 322.5,28.62 323,28.62 | IC2.2 322.49,26.45
  Top 1.27: C46.2 323,28.62
N$22
  Top 0.254: IC1.14 151.62,18.59 151.62,19.93 154.21,22.52 C35.2
N$23
  Top 0.254: LD3.A 112.95,152.07 R28.2
N$24
  Top 1.27: C36.2 IC2.4
N$25
  Top 0.305: ST1.4 202.77,149.93 R33.1
N$26
  Top 0.254: LD2.A 107.89,152.09 R30.2
N$39
  Top 0.305: ST1.3 203.57,149.02 R19.1
N$40
  Top 0.305: ST1.2 204.37,150.12 R18.1
PA10
  Top 0.254: STM32H743VIT6.69 235.15,106.42 232.31,109.26 219.49,109.26 204.25,124.5 204.25,142 208.25,146 208.25,150.25 204.75,153.75 202.25,153.75 198.5,150 198.5,147.5 199.25,146.75 200.31,146.75 R33.2 | STM32H743VIT6.69 | STM32H743VIT6.69
PA11
  Top 0.254: STM32H743VIT6.70 234.52,105.92 231.83,108.61 | 231.83,108.61 219.39,108.61 203.75,124.25 203.75,143.78 R18.2 | 231.83,108.61 231.84,108.62
  Top 0.305: 206.83,146.71 R18.2
PA12
  Top 0.254: 236.69,105.41 236.25,105.41 | 236.25,105.41 233.95,105.41 231.53,107.83 219.42,107.83 203.25,124 203.25,146.39 R19.2 | STM32H743VIT6.71 236.25,105.42 236.25,105.41
PA13  (via drill 0.34 pad 0.25)
  Top 0.254: 233.42,104.92 STM32H743VIT6.72 | 228.17,106.9 219.6,106.9 202.5,124 v202.5,140
  Top 0.305: 228.17,106.9 231.42,106.9 233.42,104.92
  Bottom 0.254: v202.5,140 206,140 215.5,149.5 226.25,149.5 227.93,151.18 SWD.4
PA14  (via drill 0.34 pad 0.25)
  Top 0.254: STM32H743VIT6.76 238.05,100.7 231.02,100.72 230.94,100.71 225.04,100.71 202,123.75 202,139.5 v200.75,140.75
  Bottom 0.254: v200.75,140.75 205.75,140.75 215.25,150.25 221.5,150.25 222.85,151.6 SWD.2
PB0  (via drill 0.34 pad 0.25)
  Top 0.254: STM32H743VIT6.34 246.87,120.52 247.22,120.87 | 247.22,124.07 247.22,127.03 246.75,127.5 242.5,127.5 241,125.75 235.75,125.75 235.5,126 v234.5,126 | v113.75,144.25 113.75,145 109.75,149 109.75,152.01 R30.1
  Top 0.305: 247.22,120.87 247.22,124.07 | R30.1 109.77,151.43
  Bottom 0.254: v234.5,126 229,120.5 138.75,120.5 138.25,121 114.25,121 113.5,121.75 113.5,144 v113.75,144.25
PB1  (via drill 0.34, 0.34 pad 0.25)
  Top 0.254: C26.2 209.94,15.33 R14.2 209.43,16.96 212.94,16.96 213.65,17.67 v213.65,37.6 | STM32H743VIT6.35 246.37,103.86 v246.11,103.6 v246.1,103.6 | v245.75,99 245.7,99 242.9,96.25 227,96.25 215,84.25 215,43.25 v213.65,41.9
  Bottom 0.254: v246.1,103.6 246.1,99.35 v245.75,99 | v213.65,41.9 v213.65,37.6
PB2
  Top 0.254: STM32H743VIT6.36 245.87,120.13 245.5,120.5 245.5,121.75 R17.2 245.35,121.85
PB4
  Top 0.254: C17.2 170.77,18.41 R9.2 170.78,19.53 176.25,25 195.5,25 214.5,44 214.5,84.5 226.75,96.75 242.5,96.75 245.87,100.12 STM32H743VIT6.90
PB6  (via drill 0.34 pad 0.25)
  Top 0.254: 246.88,115.04 246.94,115.14 | STM32H743VIT6.92 246.88,115.04 | 246.88,115.04 246.88,115.13 v247.25,115.5 | v135.25,118.5 135.25,139 135.75,139.5 148,139.5 148.13,139.63 U1.11 148.13,142.62 147.5,143.25 143.25,143.25 142.5,144 142.5,151.02 3V3_TTL.1
  Bottom 0.254: v247.25,115.5 247.25,123.5 246.5,124.25 237.25,124.25 231,118 135.75,118 v135.25,118.5
PB7  (via drill 0.3, 0.34 pad 0.25)
  Top 0.254: v250.04,107.72 250.01,107.69 247.69,107.69 247.37,107.37 247.37,105.12 247.37,105.11 STM32H743VIT6.93 | v115,150 115,151.91 R28.1
  Top 0.305: 114.82,152.03 R28.1
  Bottom 0.254: v250.04,107.72 250.04,107.79 254,111.75 254,120.5 250.25,124.25 247.25,124.25 246.75,124.75 237,124.75 230.75,118.5 136.5,118.5 135.75,119.25 134.75,119.25 133.5,118 115.75,118 112.5,121.25 112.5,147.5 v115,150
PB8  (via drill 0.34 pad 0.25)
  Top 0.254: R11.2 190.5,22.41 C19.2 190.52,22.77 191.67,23.92 194.58,23.92 v195,23.5 | STM32H743VIT6.95 248.38,100.63 243.25,95.75 227.25,95.75 215.5,84 215.5,42.5 214,41 212.5,41 v197.25,25.75
  Bottom 0.254: v197.25,25.75 v195,23.5
PB9  (via drill 0.34 pad 0.25)
  Top 0.254: R12.2 C20.2 210.04,12.54 210.75,13.25 212.75,13.25 214.35,14.85 214.35,38.35 v216.25,40.25 | STM32H743VIT6.96 248.87,100.37 243.5,95.25 227.5,95.25 216,83.75 216,44 v216.25,43.75
  Bottom 0.254: v216.25,43.75 v216.25,40.25
PB11  (via drill 0.34 pad 0.25)
  Top 0.254: STM32H743VIT6.47 240.37,120.37 240.87,120.87 | 240.87,123.41 240.87,124.88 240.5,125.25 v235,125.25 | v138,120.25 136.75,120.25 135.75,121.25 135.75,138.5 136.25,139 149.25,139 149.41,139.16 U1.12
  Top 0.305: 240.87,120.87 240.87,123.41
  Bottom 0.254: v235,125.25 229.75,120 138.25,120 v138,120.25
PB12  (via drill 0.34 pad 0.25)
  Top 0.254: C21.2 209.98,18.6 | 209.98,18.6 R13.2 | 209.98,18.6 209.98,19.23 213,22.25 213,38 v217,42 | STM32H743VIT6.51 229.75,115.5 v229.5,115.25 | v216.75,49.25 216.75,45 v217,44.75
  Bottom 0.254: v229.5,115.25 228.5,114.25 228.5,100.25 216.75,88.5 v216.75,49.25 | v217,44.75 217,42.75 v217,42
PB14  (via drill 0.3, 0.34 pad 0.25)
  Top 0.254: 228.15,114.42 STM32H743VIT6.53
  Top 0.305: 228.15,114.42 v227.68,114.88 | R29.1 v104.74,149.57
  Bottom 0.254: v227.68,114.88 227.68,115.07 226.25,116.5 115,116.5 111,120.5 111,143.31 v104.74,149.57 104.75,149.56
PC2  (via drill 0.34 pad 0.25)
  Top 0.254: C29.2 170.72,15.16 R27.2 170.94,15.44 171.75,16.25 171.75,19.75 176.5,24.5 197.25,24.5 213.25,40.5 214.5,40.5 217.75,43.75 v217.75,49.25 | STM32H743VIT6.17 252.89,111.4 v255.4,111.4
  Bottom 0.254: v255.4,111.4 255.4,106.4 259.5,102.3 259.5,98 255,93.5 255,66.5 249,60.5 222,60.5 217.75,56.25 v217.75,49.25
PC7  (via drill 0.3, 0.34)
  Top 0.254: 236.86,108.91 236.25,108.92 | 236.25,108.92 235.87,108.92 235.69,109.11 v235.3,109.11 | STM32H743VIT6.64 236.25,108.92 | IC4.3 246.62,84.38 244,87 v241.25,87
  Bottom 0.254: v241.25,87 240.75,87.5 240.75,96.75 234.75,103 234.75,108.57 v235.3,109.11
PC7_
  Top 0.254: HUB75E2.15 224.11,71.11 225.35,72.35 238.15,72.35 239.25,71.25 243.5,71.25 246,73.75 246,74.56 IC4.17 245.97,75.22 246.25,75.5 258.5,75.5 262.89,71.11 HUB75E1.15
PC8  (via drill 0.3, 0.34 pad 0.25)
  Top 0.254: STM32H743VIT6.65 235.06,108.42 232.83,110.65 219.6,110.65 205.25,125 205.25,140.5 206,141.25 206,142.44 v205.92,142.52
  Top 0.305: SD.DAT0 188.82,143.78 190.09,142.51 | 190.09,142.51 191.16,141.44 191.16,138.54 R25.2 | v190.1,142.52 190.09,142.51
  Bottom 0.305: v205.92,142.52 204.75,142.52 v190.1,142.52
PC9  (via drill 0.3, 0.34 pad 0.25)
  Top 0.254: STM32H743VIT6.66 234.53,107.92 234.53,107.94 232.51,110.05 219.45,110.05 204.75,124.75 204.75,141.35 v205.03,141.63
  Top 0.305: SD.DAT1 189.92,143.98 189.94,143.98 190.77,143.15 192.59,143.15 v193.85,141.88 194.14,141.6 R26.2
  Bottom 0.305: v205.03,141.63 205.01,141.63 204.75,141.9 v193.85,141.88
PC10  (via drill 0.3, 0.34 pad 0.25)
  Top 0.254: STM32H743VIT6.78 239.88,101.42 239.88,100.46 239.29,100.12 224.88,100.12 201.5,123.5 201.5,138.75 199.25,141 198.25,141 198,141 v197.25,141
  Top 0.305: SD.DAT2 182.22,143.52 181.85,143.16 179.22,143.16 177.71,141.64 v177.71,141.25 177.71,138.46 R21.2
  Bottom 0.305: v177.71,141.25 197,141.25 v197.25,141
PC11  (via drill 0.3, 0.34 pad 0.25)
  Top 0.254: STM32H743VIT6.79 240.38,101.42 240.38,100.23 239.49,99.56 224.69,99.56 201,123.25 201,138.25 199,140.25 v196.75,140.25
  Top 0.305: SD.DAT3/CS 183.32,143.35 182.49,142.52 182,142.52 181.5,142.02 v181.5,139.98 181.5,138.44 R22.2
  Bottom 0.305: v181.5,139.98 182.13,140.62 196.38,140.62 v196.75,140.25
PC12  (via drill 0.3, 0.34 pad 0.25)
  Top 0.254: STM32H743VIT6.80 240.88,100 239.69,98.97 224.53,98.97 200.5,123 200.5,137.75 198.75,139.5 v195.75,139.5
  Top 0.305: SD.CLK 186.62,144.12 187.94,142.8 v187.94,139.98 187.94,138.49 R24.2
  Bottom 0.305: v187.94,139.98 195.27,139.98 v195.75,139.5
PD2  (via drill 0.3, 0.34 pad 0.25)
  Top 0.254: STM32H743VIT6.83 242.37,99.85 240.74,98.44 224.31,98.44 200,122.75 200,137.21 v198.5,138.71
  Top 0.305: SD.CMD 184.42,143.49 184.63,143.28 v184.63,139.98 184.63,138.56 R23.2
  Bottom 0.305: v198.5,138.71 185.9,138.71 v184.63,139.98
PD3  (via drill 0.3, 0.34 pad 0.25)
  Top 0.254: 242.88,114.77 v242.77,114.84 242.86,114.75 STM32H743VIT6.84 | R15.1 75.92,147.33 76.25,147 108.5,147 v108.75,146.75
  Top 0.305: BTN1.3 | BTN1.1 BTN1.3 | R15.1 BTN1.3
  Bottom 0.254: v242.77,114.84 242.88,115.01 242.88,119.63 244.75,122.5 244.75,123 244.5,123.25 237.75,123.25 231.5,117 115.25,117 111.5,120.75 111.5,144 v108.75,146.75
PD4  (via drill 0.3, 0.34 pad 0.25)
  Top 0.254: v243.49,114.48 243.39,114.38 243.39,101.46 243.37,101.44 STM32H743VIT6.85 | R16.1 89.4,147.6 89.5,147.5 v109.5,147.5
  Top 0.305: 243.39,101.46 243.38,101.46 | BTN2.1 BTN2.3 R16.1
  Bottom 0.254: v243.49,114.48 243.39,115.39 243.39,119.39 245.25,122.25 245.25,123.25 244.75,123.75 237.5,123.75 231.25,117.5 115.5,117.5 112,121 112,145 v109.5,147.5
PD7
  Top 0.254: STM32H743VIT6.88 244.9,101.42 244.9,100.55 244.8,100.55 241.95,97.7 224.7,97.7 224.25,97.25 SJ3.2
PD10  (via drill 0.3, 0.34)
  Top 0.254: 235.86,112.42 | v233.15,113.15 235.15,113.15 235.86,112.44 235.86,112.42 | STM32H743VIT6.57 235.86,112.42 | 242.72,80.78 IC4.9 242.75,80.44 242.75,81.25 242.45,81.55 v241.25,81.55
  Bottom 0.254: v233.15,113.15 232.95,113.05 232.05,112.25 232.05,101.8 238.25,95.5 238.25,88.75 238,88.5 238,84.55 241,81.55 v241.25,81.55
PD10_
  Top 0.254: HUB75E2.9 224.23,78.73 225.45,79.95 227.55,79.95 231.5,76 239.5,76 240.25,75.25 242.07,75.25 | HUB75E1.9 263.58,78.62 244.7,78.62 242.07,76.25 242.07,75.25 | IC4.11 242.07,75.25
PD11  (via drill 0.3, 0.34)
  Top 0.254: v233.4,112.35 233.75,112.55 234.98,112.56 235.64,111.92 STM32H743VIT6.58 | IC4.8 243.38,81.88 242.8,82.45 v241.25,82.45
  Bottom 0.254: v233.4,112.35 232.6,111.75 232.6,102.1 238.75,95.75 238.75,88.5 238.5,88.25 238.5,85 241.05,82.45 v241.25,82.45
PD11_
  Top 0.254: HUB75E1.10 266.23,78.73 265,77.5 260.5,77.5 260,78 244.75,78 242.75,76 242.75,74.61 | 242.75,74.61 IC4.12 | 242.75,74.61 242.75,73.75 242.25,73.25 241.25,73.25 239.25,75.25 231.25,75.25 227.77,78.73 HUB75E2.10
PD12  (via drill 0.34)
  Top 0.254: STM32H743VIT6.59 235.38,111.42 234.9,111.9 v234.6,111.9 | IC4.7 244.03,82.72 243.35,83.4 v241.25,83.4
  Bottom 0.254: v234.6,111.9 233.85,111.9 233.1,111.25 233.1,102.35 239.25,96 239.25,88.25 239,88 239,85.5 241.1,83.4 v241.25,83.4
PD12_
  Top 0.254: HUB75E2.11 225.2,77.4 228.1,77.4 231,74.5 239,74.5 240.75,72.75 242.5,72.75 243.4,73.65 243.4,74.61 | 243.4,74.61 IC4.13 | HUB75E1.11 260.81,76.19 259.62,77.38 244.97,77.38 243.4,75.8 243.4,74.61
PD13  (via drill 0.3, 0.34)
  Top 0.254: 236.94,110.92 236.25,110.92 | 236.25,110.92 235.95,110.92 235.26,110.92 235.2,110.92 234.85,111.25 v234.02,111.25 | STM32H743VIT6.60 236.25,110.92 | IC4.6 244.68,83.08 243.45,84.3 v241.25,84.3
  Bottom 0.254: v234.02,111.25 233.85,111.25 233.65,111.05 233.65,102.45 233.7,102.4 239.75,96.25 239.75,88 239.5,87.75 239.5,86 241.2,84.3 v241.25,84.3
PD13_  (1 unrouted)
  Top 0.254: HUB75E1.12 265.94,76.19 264.75,75 261,75 259.25,76.75 245,76.75 244.03,75.78 IC4.14 244.03,73.53 242.75,72.25 240.25,72.25 238.75,73.75 230.75,73.75 228.25,76.25 226.58,76.25
PD14  (via drill 0.3, 0.34)
  Top 0.254: 236.25,110.41 235.94,110.41 235.54,110.41 235.37,110.41 235.17,110.41 234.77,110.63 v234.55,110.63 | 236.25,110.41 236.88,110.41 | STM32H743VIT6.61 236.25,110.42 236.25,110.41 | IC4.5 245.32,83.67 243.8,85.2 v241.25,85.2
  Bottom 0.254: v234.55,110.63 234.53,110.63 234.15,110.25 234.19,102.79 234.19,102.66 240.25,96.5 240.25,87.75 240,87.5 240,86.3 241.1,85.2 v241.25,85.2
PD14_  (via drill 0.35)
  Top 0.254: HUB75E1.8 266.27,81.17 265.1,80 263,80 262.25,79.25 v244.7,79.25 244.45,79.5 237,79.5 235.23,81.27 HUB75E2.8 | IC4.15 244.68,75.62 v244.7,75.65
  Bottom 0.254: v244.7,75.65 v244.7,79.25
PD15
  Top 0.254: STM32H743VIT6.62 234.33,109.92 232,112.25 SJ2.2
PD15_
  Top 0.254: HUB75E1.14 266.27,73.52 265.15,72.4 262.6,72.4 259.62,75.38 259,76 258.88,76.12 245.78,76.12 245.35,75.7 245.35,74.61 IC4.16 245.32,73.83 243.25,71.75 239.75,71.75 238.5,73 227.75,73 227.1,73.65 HUB75E2.14
PDRON
  Top 0.254: 250.38,97.34 R4.1 250.39,101.4 STM32H743VIT6.99
PE0  (via drill 0.34 pad 0.25)
  Top 0.254: STM32H743VIT6.97 249.37,99.79 249.38,99.78 249.38,99.63 v247.75,98 | IC6.4 v249.75,63.27
  Bottom 0.254: v247.75,98 247.75,87.75 249.75,85.75 v249.75,63.27
PE1  (via drill 0.34 pad 0.25)
  Top 0.254: STM32H743VIT6.98 249.87,99.12 v248.75,98 | IC6.5 250.47,63.92 v250.5,63.95
  Bottom 0.254: v248.75,98 248.75,87.75 250.5,86 v250.5,63.95
PE2  (via drill 0.34 pad 0.25)
  Top 0.254: v254.38,102.31 253.27,103.42 252.94,103.42 STM32H743VIT6.1 | IC6.6 251.22,64.58 v251.25,64.6
  Bottom 0.254: v254.38,102.31 254.38,97.38 251.25,94.25 v251.25,64.6
PE3  (via drill 0.34 pad 0.25)
  Top 0.254: v255.38,102.3 253.76,103.92 STM32H743VIT6.2 | IC6.7 v251.93,65.22
  Bottom 0.254: v255.38,102.3 255.38,97.62 252,94.25 252,65.3 v251.93,65.22
PE4  (via drill 0.34 pad 0.25)
  Top 0.254: v256.43,102.29 254.3,104.42 STM32H743VIT6.3 | IC6.8 252.72,65.88 v252.75,65.9
  Bottom 0.254: v256.43,102.29 256.43,97.92 252.75,94.25 v252.75,65.9
PE5  (via drill 0.34 pad 0.25)
  Top 0.254: v257.43,102.27 254.78,104.92 STM32H743VIT6.4 | IC6.9 253.47,66.53 v253.5,66.55
  Bottom 0.254: v257.43,102.27 257.43,98.17 253.5,94.25 v253.5,66.55
PE6  (via drill 0.34 pad 0.25)
  Top 0.254: STM32H743VIT6.5 255.44,105.42 255.44,105.31 v258.5,102.25 | v254.5,94.25 241.5,94.25 241,93.75 241,92.75 241.62,92.12 IC5.3 | IC6.3 247.69,62.6 250.6,62.6 254.25,66.25 v254.25,67.2
  Bottom 0.254: v254.25,67.2 254.25,94 v254.5,94.25 258.5,98.25 v258.5,102.25
PE9  (via drill 0.34, 0.34 pad 0.25)
  Top 0.254: STM32H743VIT6.39 244.37,122.13 v244,122.5 | IC5.4 234.03,91.47 v233.65,91.85
  Bottom 0.254: v244,122.5 237.75,122.5 229,113.75 229,100.25 233.65,95.6 v233.65,91.85
PE10  (via drill 0.34, 0.34 pad 0.25)
  Top 0.254: STM32H743VIT6.40 243.87,121.38 v243.5,121.75 | IC5.5 v234.32,90.83
  Bottom 0.254: v243.5,121.75 237.75,121.75 229.5,113.5 229.5,100.5 234.4,95.6 234.4,91 v234.32,90.83
PE11  (via drill 0.34, 0.34 pad 0.25)
  Top 0.254: IC5.6 235.32,90.17 v235.15,90.15 | STM32H743VIT6.41 243.37,120.63 v243,121
  Bottom 0.254: v243,121 237.75,121 230,113.25 230,100.75 235.15,95.6 v235.15,90.15
PE12  (via drill 0.34, 0.34 pad 0.25)
  Top 0.254: STM32H743VIT6.42 242.87,119.88 v242.5,120.25 | IC5.7 236.03,89.53 v235.9,89.5
  Bottom 0.254: v242.5,120.25 237.75,120.25 230.5,113 230.5,101 235.9,95.6 v235.9,89.5
PE13  (via drill 0.34, 0.34 pad 0.25)
  Top 0.254: IC5.8 236.82,88.88 v236.7,88.9 | STM32H743VIT6.43 242.37,119.13 v242,119.5
  Bottom 0.254: v242,119.5 237.75,119.5 231,112.75 231,101.25 236.65,95.6 236.65,89 | 236.65,89 236.75,88.95 v236.7,88.9 236.7,88.95 236.65,89
PE14  (via drill 0.34, 0.34 pad 0.25)
  Top 0.254: STM32H743VIT6.44 241.87,118.38 v241.5,118.75 | IC5.9 237.53,88.22 v237.3,88.05
  Bottom 0.254: v241.5,118.75 237.75,118.75 231.5,112.5 231.5,101.5 237.4,95.6 237.4,88.15 v237.3,88.05
PE15  (via drill 0.38)
  Top 0.254: IC4.4 245.97,84.03 243.9,86.1 242.15,86.1 v242,86.25 | STM32H743VIT6.45 241.37,115.88 v241.5,115.75
  Bottom 0.254: v242,86.25 242,87.5 241.25,88.25 241.25,97.25 235.25,103.25 235.25,108 236,108.75 236,114.5 237.25,115.75 v241.5,115.75
PH0
  Top 0.254: R6.2 256,108.92 STM32H743VIT6.12
PH1
  Top 0.254: 256.72,109.42 R7.2 256.72,109.42 STM32H743VIT6.13
PIN_DMD_DCLK
  Top 0.254: R10.2 170.69,11.69 C18.2 166.96,13.26 163.05,13.26 161.94,14.37 SJ1.2 150.82,14.37 150.24,13.79 150.24,12.48 IC1.2
PIN_DMD_DCLK_
  Top 0.254: IC1.13 152.86,17.38 154.27,15.97 161.5,15.97 SJ1.1 161.58,17.58 164.25,20.25 170.75,20.25 176,25.5 195,25.5 214,44.5 214,84.75 226.5,97.25 242.25,97.25 245.37,100.37 STM32H743VIT6.89 245.37,114.63 244.5,115.5 242.35,115.5 241.75,115 241,115 240.87,115.13 STM32H743VIT6.46
R0_1  (via drill 0.35)
  Top 0.254: IC6.16 239.32,63.92 v239,64.25
  Bottom 0.254: HUB75E2.1 224.11,88.89 225.4,87.6 227.4,87.6 239,76 v239,64.25
R0_2
  Top 0.254: IC5.16 261.8,90.83 HUB75E1.1
R1_1  (via drill 0.35)
  Top 0.254: IC6.13 241.12,65.88 240.5,66.5 237.25,66.5 v236.75,67
  Bottom 0.254: HUB75E2.5 arc45 224.01,83.74 225.25,82.5 228.75,82.5 236.75,74.5 v236.75,67
R1_2
  Top 0.254: IC5.13 257.88,88.88 262.94,83.81 HUB75E1.5
RESET  (via drill 0.34 pad 0.25)
  Top 0.254: v258.83,110.86 255.88,110.86 254.94,109.92 STM32H743VIT6.14 | 119.56,147.24 119.56,147.06 119.5,147 116.25,147 v115.25,147
  Top 0.305: RESET.3 RESET.1 117.97,154.25 117.97,149.93 119.56,148.34 | 119.56,148.34 R3.1 119.56,147.24 | 119.56,148.34 119.56,149.11 120.05,149.6 124.18,149.6 C2.1
  Bottom 0.254: v258.83,110.86 258.83,119.42 253,125.25 247.75,125.25 247.25,125.75 236.5,125.75 230.25,119.5 137.5,119.5 136.5,120.5 114,120.5 113,121.5 113,144.75 v115.25,147
RX1
  Top 0.254: U1.13 150.68,142.12 148.76,144.03 148.76,147.27 147.71,148.33 147.71,149.96 148.5,150.75 151,150.75 151.75,151.5 151.75,153.19 RS232.3
TX1
  Top 0.254: U1.14 151.94,143.65 151.3,144.29 151.3,147.39 151.94,148.02 151.94,149.69 152.75,150.5 155.75,150.5 156.75,151.5 156.75,153.27 RS232.1
VBAT
  Top 0.254: 260.58,106.69 R2.1 260.54,106.69 256.2,106.69 | 264,106.72 C1.+ | 255.42,105.92 STM32H743VIT6.6
  Top 0.305: 255.42,105.92 256.2,106.69
  Top 0.406: R2.1 263.94,106.69 C1.+
VCAP1
  Top 0.254: 239.38,121.83 C3.1 239.35,120.73 239.87,120.21 STM32H743VIT6.48
VCAP2
  Top 0.254: STM32H743VIT6.73 232.65,104.42
  Top 0.305: 232.65,104.42 231.23,105.83 230.28,105.83 C4.1
VDDA
  Top 0.254: STM32H743VIT6.21 254.01,113.42 254,113.42
  Top 0.305: 254,113.42 255.27,114.69 255.27,117.1 C16.1
  Top 0.406: C16.1 259.77,118.47 261.35,120.05 R8.2 | 262.4,120.35 R8.2 | R8.2 277.85,120.04 C15.1 281.78,119.95 L1.2
VIN
  Top 0.254: D3.C 301.56,23.69 301.75,23.5
  Top 0.813: 316.97,27.32 IC2.5
  Top 1.27: 316.97,27.32 C36.1
  Top 1.93: C38.1 313.5,23.62 313.5,26 316,26 316,27 316.97,27.32
  Top 2.54: 316,27 316,31.25 312,31.25 | 312,31.25 306.75,31.25 301.75,26.25 301.75,23.5 301.75,23 299.75,21 | 299.75,21 298.5,19.75 298.5,15.02 X1.3 | PWR.1 273.68,18.43 276.25,21 299.75,21 | C39.+ 311.93,31.32 312,31.25
VREF
  Top 0.254: R8.1 259.49,115.83 C14.1 254.28,112.92 STM32H743VIT6.20 | 265.68,118.74 C13.1
  Top 0.305: R8.1 262.52,118.26 C13.1

## Text on the board
tNames: TX | GND | RX | GND | TX | C31 | +3V3 | CLK | GND | DIO | R29 | R30 | R28 | C33 | C30 | C32 | R33 | R19 | R18 | R21 | R22 | R23 | R24 | R25 | R26 | C34 | C3 | + | + | + | C7 | + | + | C14 | C4 | + | C10 | + | C12 | C27 | C28 | C42 | COLORPRISM HD 256x64 | R11 | C19 | 8-36V DC | C35 | C17 | R9 | R13 | C21 | C29 | R27 | R14 | C26 | V+ | C41 | R12 | C20 | C18 | R10 | GND | GND | EVO HD 256X64 BOARD REV 1.0 / (C) 2021 WWW.PIN2DMD.COM | C40 | V+ | KEY
bNames: - | + | + | - | - | + | - | + | + | - | + | -